# Altium PCB POWER.PcbDoc
Units mil, origin at the board's own origin, x right, y up, seen from the top; angles counter-clockwise.
Board outline 1655 x 985 mil, 2 copper layers (Top Layer, Bottom Layer); 10 components, 4 nets, 24 pads, 2 vias.
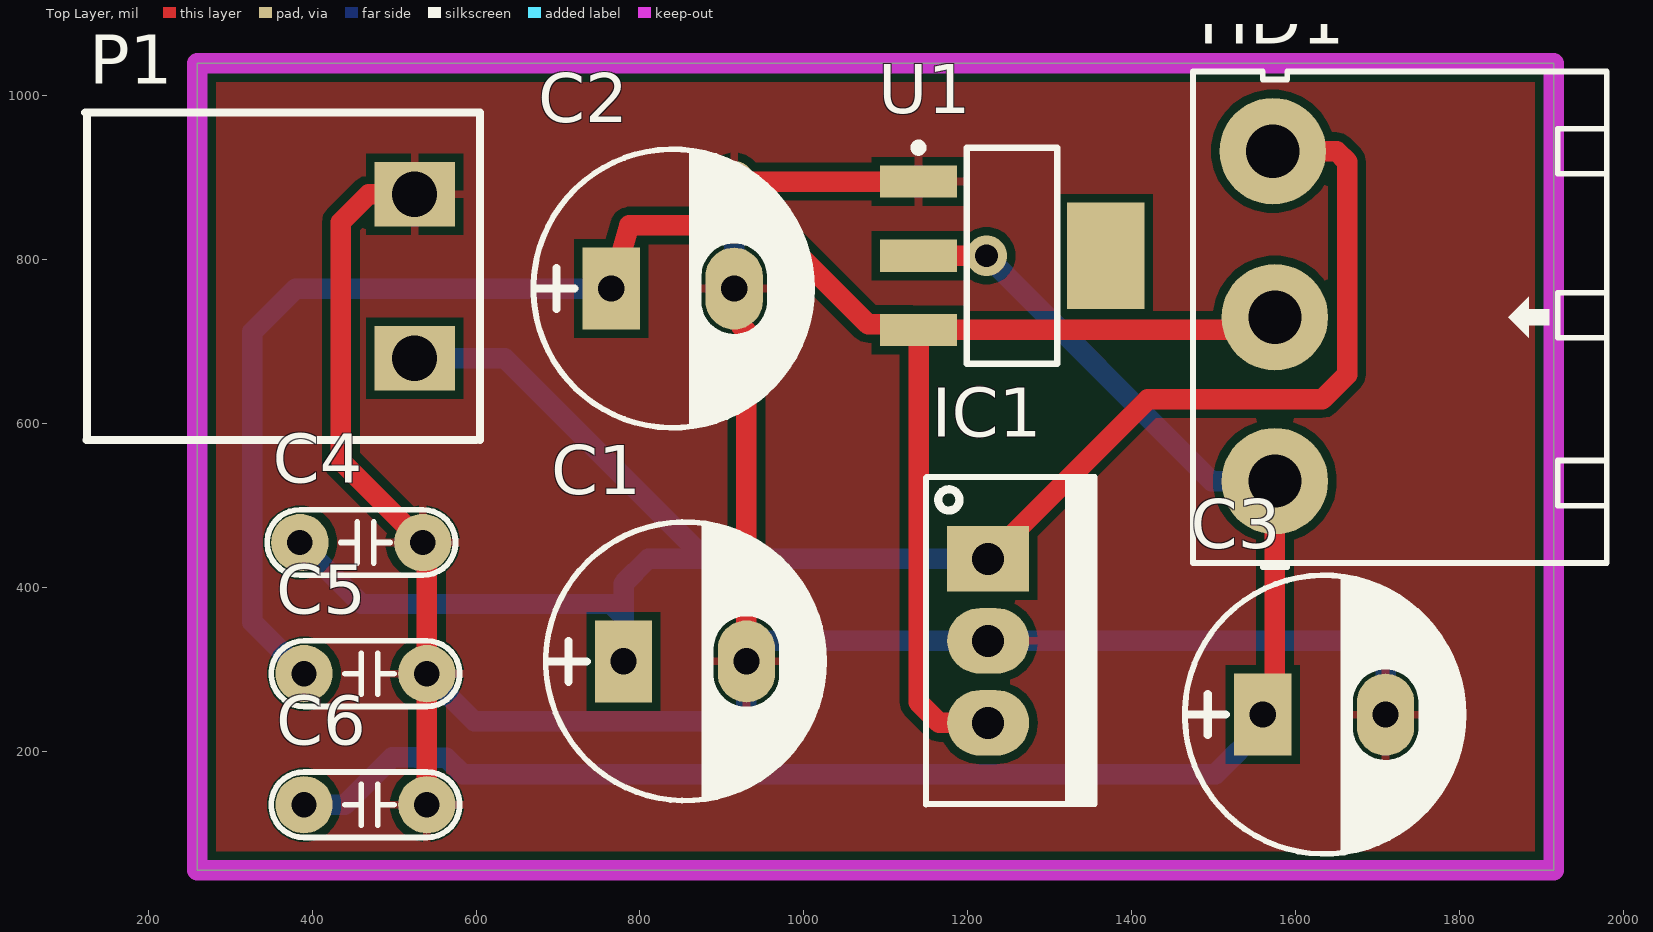
[diagram p0: Top Layer view]
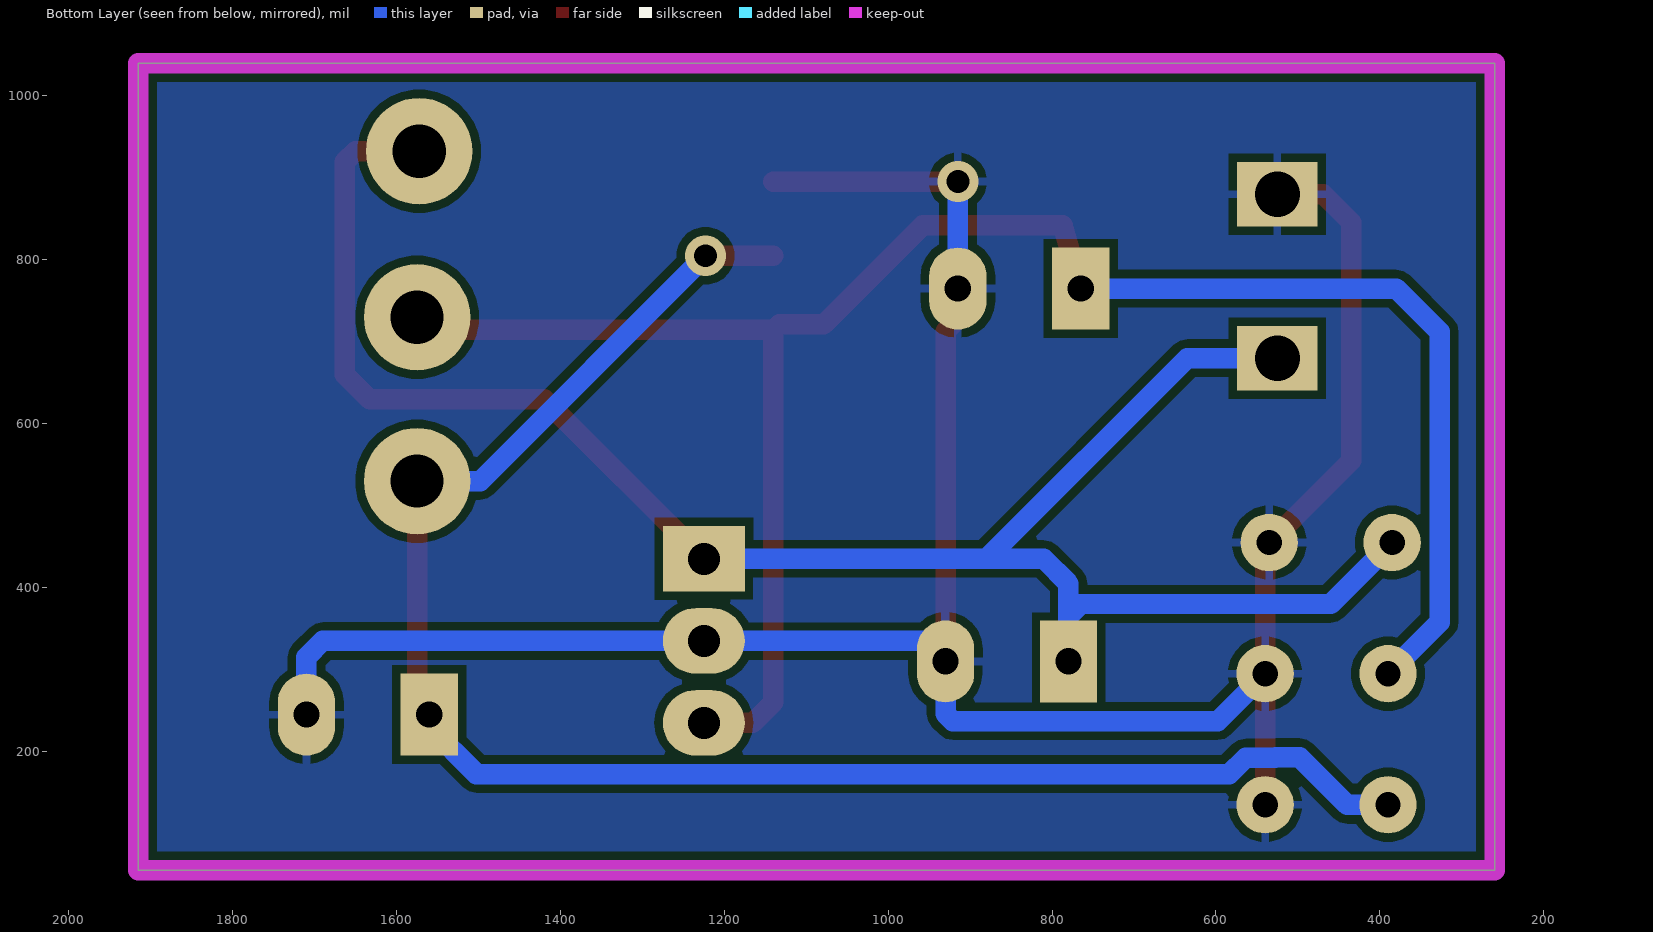
[diagram p1: Bottom Layer view, seen from below]

## Layer stack, top to bottom
Top Solder: solder mask 0.4, Solder Resist, Dk 3.5
Top Layer: signal copper 1.4
Dielectric 1: dielectric 12.6, FR-4, Dk 4.8
Bottom Layer: signal copper 1.4
Bottom Solder: solder mask 0.4, Solder Resist, Dk 3.5

## Board outline
260,55 1915,55 1915,1040 260,1040

## Design rules (kind name [scope] priority, off if disabled: settings)
Clearance [All] p1: gap=10 ignorepadtopadclearanceinfootprint=FALSE except(0: Arc-Hole Track-Hole SMDPad-Hole THPad-Hole Via-Hole Fill-Hole Poly-Hole Region-Hole Text-Hole)
PolygonConnect [All] p1: connectstyle=Relief reliefconductorwidth=10 reliefentries=4 polygonreliefangle="90 Angle" airgapwidth=10
RoomDefinition POWER [InComponentClass('POWER')] p1: confinementstyle=ConfineIn formatcopy=TRUE lockcomponents=FALSE outline 2035,60 5380,60 5380,785 2035,785
RoutingVias [All] p1: holewidth=28 width=50 viastyle="Through Hole" minholewidth=28 minwidth=50 maxholewidth=28 maxwidth=50
SolderMaskExpansion [All] p1: expansion=4 istentingtop=FALSE
Width [InNetClass('POWER')] p1: maxlimit=50 minlimit=15 preferedwidth=25
30 further rules are at their usual default settings.

## Classes and differential pairs
net class POWER: 3V3 5V 12V GND
component class POWER: C1 C2 C3 C4 C5 HD1 IC1 P1 U1

## Components (designator, comment, footprint, x,y, rotation, side; value= is the part's Value field where it differs from the comment)
C1 "100uF/25V" CP1.5/3.4 780,310 r0 top value=100uF/35V/50V
C2 "100uF/25V" CP1.5/3.4 765,765 r0 top value=100uF/35V/50V
C3 "100uF/25V" CP1.5/3.4 1560,245 r0 top value=100uF/35V/50V
C4 "100nF/50V" CN1.5 535,455 r180 top value=0.01uF
C5 "100nF/50V" CN1.5 540,295 r180 top value=0.01uF
C6 "100nF/50V" CN1.5 540,135 r180 top value=0.01uF
HD1 "Header 3" HED3T 1575,530 r90 top
IC1 "LM7805" QTO-220 1225,435 r270 top
P1 "Header 2" "BIG_Header 2" 525,680 r90 top
U1 "LM1117-3.3V" SOT223-4N 1254.17,805 r0 top

## Footprints (in the part's own frame and the unit in brackets; to place one, negate y for a bottom-side part, rotate by r counter-clockwise, add the part's x,y. Pads: shape width x height; smd on the part's side, far side on the other; paste and mask are expansions set on the pad)
"BIG_Header 2" [mm]
  rect 2x2.5 hole 1.4: 1(0,0) 2(5.08,0)
  silkscreen extent -2.54,-2.03 7.62,10.21, body extent -2.5,-1.75 7.58,10.25, height 3.15
CN1.5 [mil]
  round 70 hole 31: 1(0,0) 2(150,0)
  silkscreen extent -40,-40 190,40, body extent -40,-33 190,33, height 235
CP1.5/3.4 [mil] "Tu hoa 220->470uF,16V, 470uF/16V,25V"
  rect 70x100 hole 32: 1(0,0)
  oval 70x100 hole 32: 2(150,0)
  silkscreen extent -95,-170 245,170, body extent -85,-157 230,157, height 446
HED3T [mil] "Header 3, 3 pin, hight 300mil, Pin to Pin 200, Colour Green"
  round 130 hole 65: 1(0,0) 2(200,0) 3(402.62,2.62)
  silkscreen extent -105,-405 500,100, body extent -95,-404 496,68, height 124
QTO-220 [mil] "TO-220 - 1-2-3"
  rect 80x100 hole 39: 1(0,0)
  oval 80x100 hole 39: 2(100,0) 3(200,0)
  silkscreen extent -100,-76 300,130, body extent -119,-64 322,121, height 755
SOT223-4N [mm] "SOT223, 4-Leads, Body 6.5x3.5mm, Pitch 2.3mm, Lead Span 7mm, IPC Medium Density"
  rect 2.4x1 smd: 1(-2.9,2.3) 2(-2.9,0) 3(-2.9,-2.3)
  rect 2.4x3.3 smd: 4(2.9,0)
  silkscreen extent -3.02,-3.35 1.4,3.47, body extent -3.39,-3.27 3.5,3.23, height 1.72

## Part data
C1 C2 C3: library part CP3, "Cap 100uF/35V - 470uF/16V", Description 1="1000uF/6,3V - 470uF/16V - 330uF - 25V", Description 2="220uF/35V - 100uF/50V - 63V - 4,7uF/200V", Description 3="22uF => 33uF100V - 3,3uF => 4,7uF/250V", Description 4="2,2uF =>3,3uF/350 - 2,2uF/400V - 1uF/450V"
C4 C5 C6: library part CN1.5, "Cap np 682pF => 104pF"
HD1: library part Hed3, "Header 3 (Green)"
IC1: library part LM78xx, "On ap +, from + 5 to + 24VDC"
P1: "Big Header 2"
U1: library part LM1117, "800mA Low-Dropout Linear Regulator", Creator="Nguyen Ba Bien", Website=http://group3i.net

## Via types
v1: diameter 50, hole 28, Top Layer to Bottom Layer, 2 vias

## Nets (pads, with @x,y where several pads share a name; then routed paths per layer and width w, separated by ;. In a path a pad name is that pad's centre, name@x,y a point inside that pad or via, vN(x,y) a via of type N, cw(c..) or ccw(c..) an arc to the next point about the centre after c; other vN are vias at no path point)
3V3: C3.1 C6.2 HD1.1 U1.2 | length 2081.5
  Top Layer w25: U1.2 v1(1223,805) ; C3.1 1575,260 HD1.1
  Bottom Layer w25: C6.2 440,135 498,193 527,193 527.5,192.5 563.82,192.5 583.82,172.5 1502.5,172.5 1560,230 C3.1 ; v1(1223,805) 1498,530 HD1.1
5V: C2.1 C5.2 HD1.2 IC1.3 U1.3 | length 2380.2
  Top Layer w25: C2.1 787,842 958,842 1078.37,721.63 1132.81,721.63 U1.3 ; IC1.3 1165,235 1140,260 U1.3 ; HD1.2 1559.45,714.45 U1.3
  Bottom Layer w25: C5.2 327,358 327,712 380,765 C2.1
12V: C1.1 C4.2 HD1.3 IC1.1 P1.1 | length 2328.2
  Top Layer w25: IC1.1 1420,630 1633,630 1663,660 1663,920 1650.38,932.62 HD1.3
  Bottom Layer w25: C4.2 460,380 765,380 780,365 ; P1.1 635,680 880,435 ; C1.1 780,365 ; IC1.1 880,435 ; 780,365 780,375 780,405 810,435 880,435
GND: C1.2 C2.2 C3.2 C4.1 C5.1 C6.1 IC1.2 P1.2 U1.1 | length 3040.4
  Top Layer w25: P1.2 469,880 435,846 435,555 540,450 C5.1 C6.1 ; C2.2 923.61,756.39 923.61,719.24 930,712.86 C1.2 ; v1(915,895.55) U1.1
  Bottom Layer w25: C5.1 598,237 921,237 930,246 C1.2 930,335 IC1.2 1690,335 1710,315 C3.2 ; C2.2 v1(915,895.55)
pads on no net: U1.4

## Polygon pours and split planes (outlines as drawn)
GND on Bottom Layer "GND_L02_P000" (solid, remove dead copper, pour order 0): 260,55 1905,55 1917.97,67.97 1917.97,1041.56 263.44,1041.56 260,1045 260,60
GND on Top Layer "GND_L01_P002" (solid, remove dead copper, pour order 2): 259.34,61.88 264.05,57.17 1911.32,57.17 1911.32,1039.91 1910.37,1038.96 260.13,1038.96 260.13,59.07 261.08,58.12

## Keep-outs
Keep-Out Layer:
  the board outline again, w25